# EAGLE board PowerBoard - Kopia (EAGLE 6.5.0), part 1 of 2
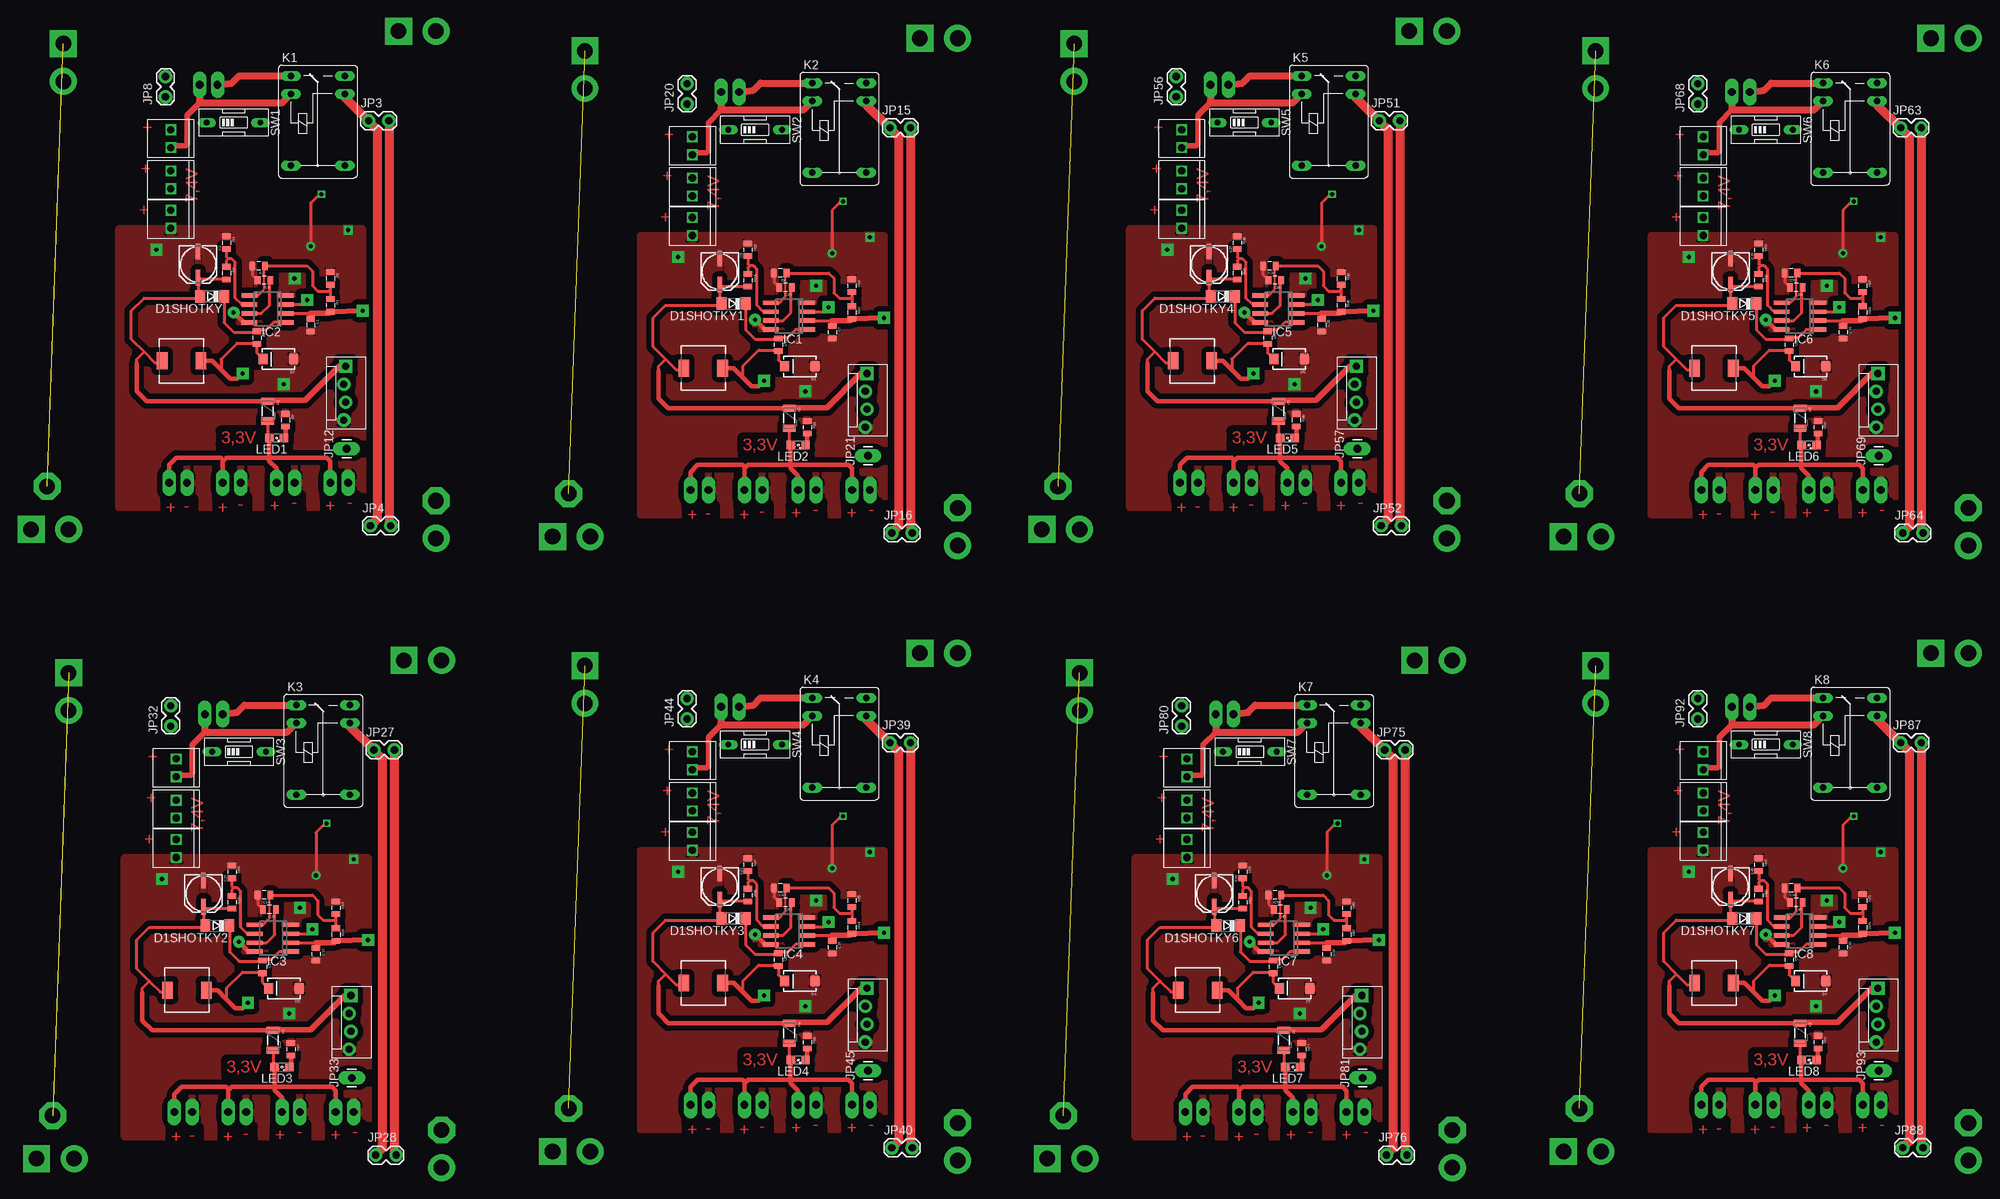
[diagram p0: board, top side]
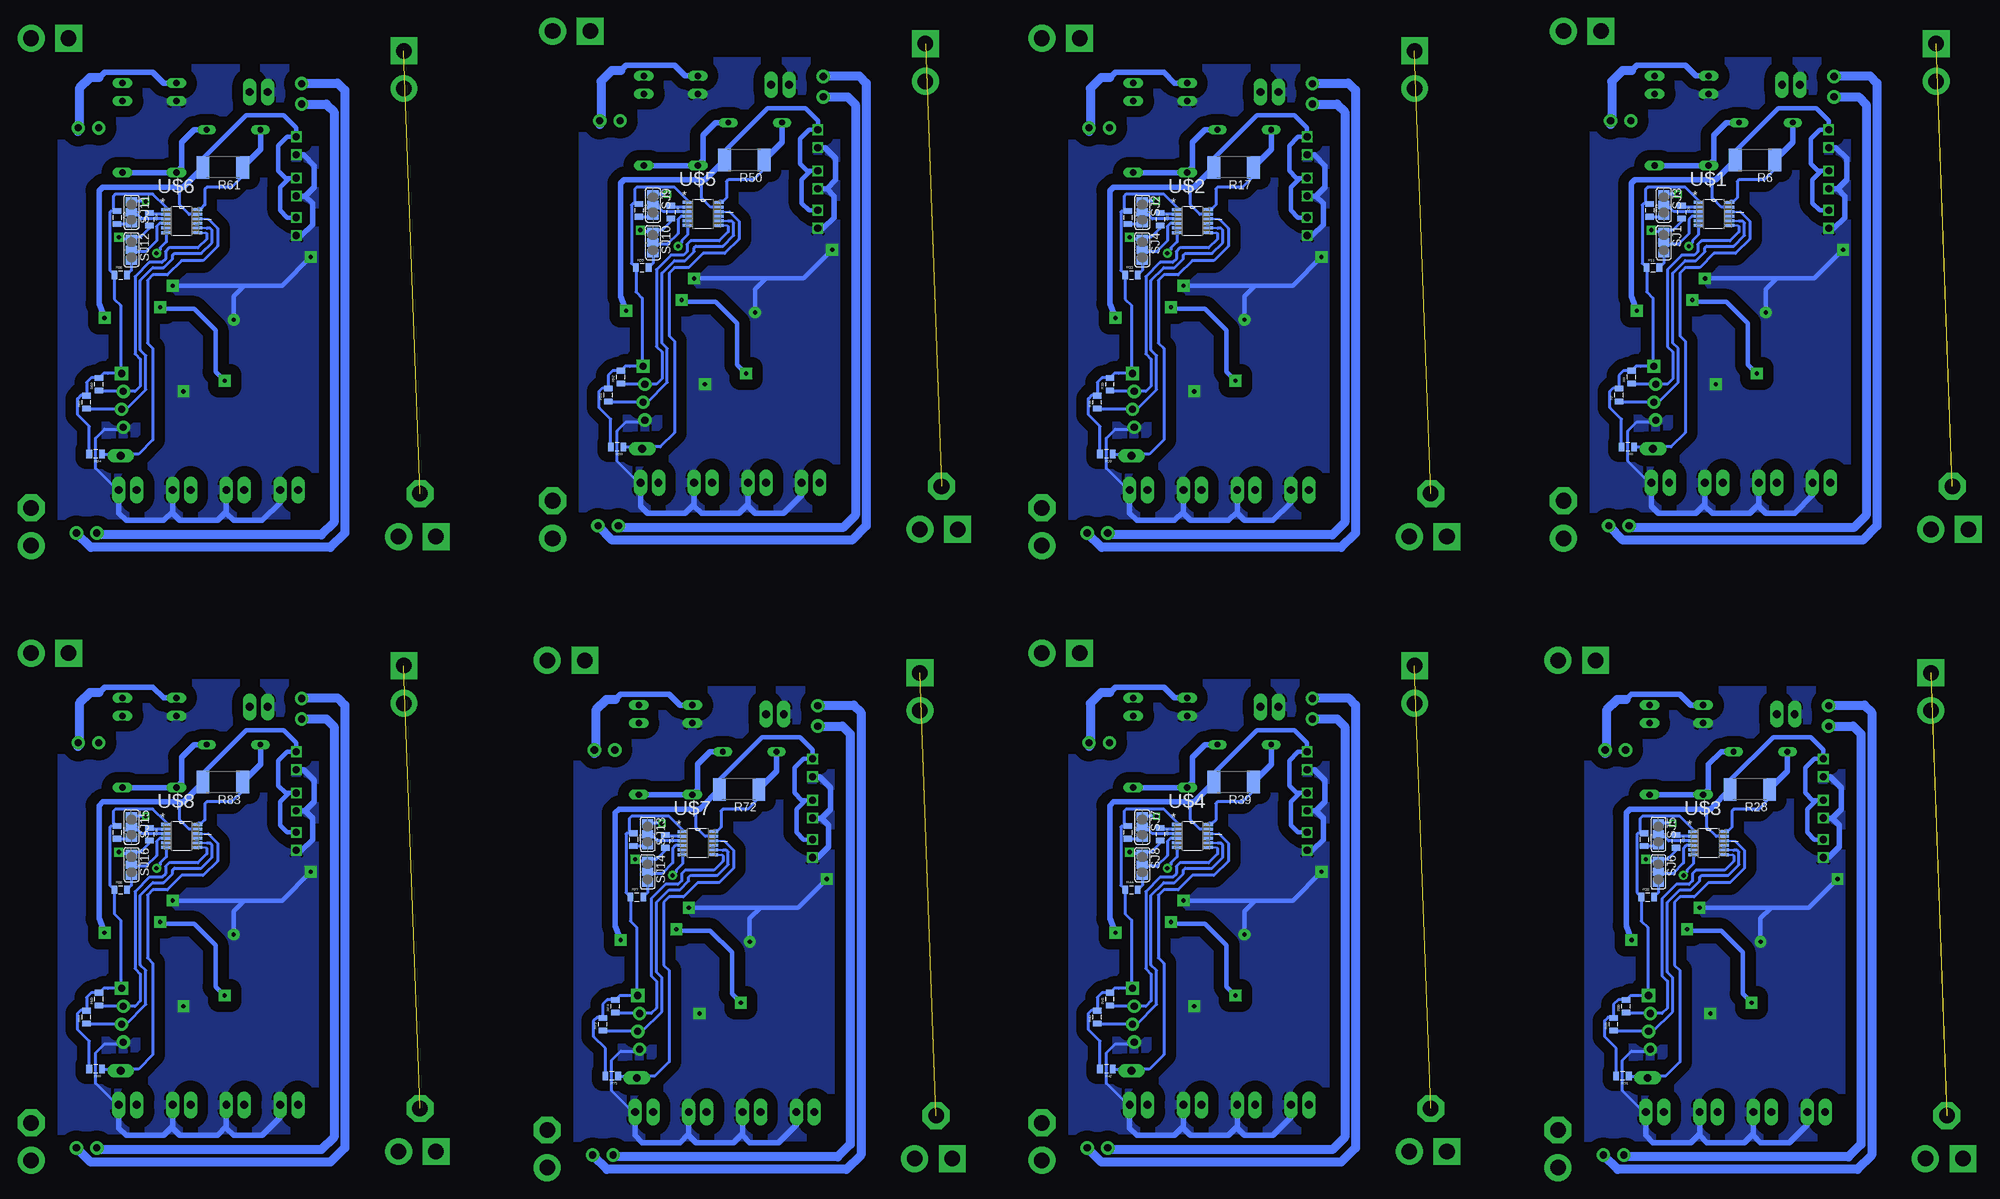
[diagram p1: board, bottom side, seen from below]

No outline drawn. Coordinates in mm, seen from the top.
Copper layers (1*16): Top 0.035mm / dielectric 1.5mm / Bottom 0.035mm
Design rules "default": minimum track width 10mil, minimum drill 24mil, track to track 8mil, track to pad 8mil, pad to pad 8mil, via to via 8mil, smd to smd 8mil, copper to edge 40mil, drill to drill 8mil, minimum pad ring 10mil, minimum via ring 8mil, stop-mask expansion 4mil, vias tented up to drill 0mil, thermal gap 10mil

## Footprints (pad centres in the part's own frame; a part is rotated, then mirrored left to right if it is on the bottom)
0805 = smd 0.8 x 1.2: 1 -0.9,0; 2 0.9,0
PANASONIC_C = smd 2.2 x 0.65: + 1.9,-0.2; - -1.8,-0.2
SMA-DIODE = smd 1.27 x 1.47: A -2.15,0; C 2.15,0
SOD80C = smd 1.4 x 1.8: A 1.7,0; C -1.7,0
PTC-1206 = smd 1 x 1.8: 1 -1.4,0; 2 1.4,0
SOIC8 = smd 0.6 x 2.2: 1 -1.905,-2.6; 2 -0.635,-2.6; 3 0.635,-2.6; 4 1.905,-2.6; 5 1.905,2.6; 6 0.635,2.6; 7 -0.635,2.6; 8 -1.905,2.6
1X02_LONGPADS = drill 1.118 pad 1.88 long: 1 0,0; 2 2.54,0
1X02_LOCK = drill 1.016 pad 1.88: 1 -0.178,0; 2 2.718,0
1X02_2.54_SCREWTERM = drill 1.016 square: P1 2.54,0; P2 0,0
1X01_LONGPAD = drill 1.118 pad 1.88 long: 1 0,0
FRS1B = drill 0.914 long: 1 0,3.81; 2 0,-3.81; O -2.54,-3.81; P 10.16,3.81; P@ 10.16,-3.81; S -2.54,3.81
B82462G = smd 2.4 x 1.5: P$1 0,2.75; P$2 0,-2.75
SML0805 = smd 1.2 x 1.2: A 1.05,0; C -1.05,0
MOLEX-1X4_LOCK = drill 1.016 pad 1.88 square: 1 0,0.127 | drill 1.016 pad 1.88: 2 2.54,-0.127; 3 5.08,0.127; 4 7.62,-0.127
R2512 = smd 1.8 x 3.2: 1 -2.8,0; 2 2.8,0
PAD-JUMPER-3-NO_YES_SILK_FULL_BOX = smd 1.168 x 1.6: 1 -1.524,0; 2 0,0; 3 1.524,0
EDG-01 = drill 0.813 long: 1 0,-3.81; 2 0,3.81
SOP65P490X110-12N = smd 1.397 x 0.432: 1 -2.184,1.626; 2 -2.184,0.965; 3 -2.184,0.33; 4 -2.184,-0.33; 5 -2.184,-0.965; 6 -2.184,-1.626; 7 2.184,-1.626; 8 2.184,-0.965; 9 2.184,-0.33; 10 2.184,0.33; 11 2.184,0.965; 12 2.184,1.626

## Placement (x,y rotation side)
C1  2.2uF  [0805]  51.05,61.21 270 top
C2  1nF  [0805]  43.69,69.6 180 top
C3  10uF  [PANASONIC_C]  35.31,69.85 270 top
C4  2.2nF  [0805]  44.45,67.56 180 top
C5  1nF  [0805]  43.43,59.44 270 top
C6  0.1uF  [0805]  52.07,77.22 270 bottom
C7  2.2uF  [0805]  124.97,60.2 270 top
C8  1nF  [0805]  117.6,68.58 180 top
C9  10uF  [PANASONIC_C]  109.22,68.83 270 top
C10  2.2nF  [0805]  118.36,66.55 180 top
C11  1nF  [0805]  117.35,58.42 270 top
C12  0.1uF  [0805]  125.98,76.2 270 bottom
C13  2.2uF  [0805]  51.82,-27.94 270 top
C14  1nF  [0805]  44.45,-19.56 180 top
C15  10uF  [PANASONIC_C]  36.07,-19.3 270 top
C16  2.2nF  [0805]  45.21,-21.59 180 top
C17  1nF  [0805]  44.2,-29.72 270 top
C18  0.1uF  [0805]  52.83,-11.94 270 bottom
C19  2.2uF  [0805]  124.97,-26.92 270 top
C20  1nF  [0805]  117.6,-18.54 180 top
C21  10uF  [PANASONIC_C]  109.22,-18.29 270 top
C22  2.2nF  [0805]  118.36,-20.57 180 top
C23  1nF  [0805]  117.35,-28.7 270 top
C24  0.1uF  [0805]  125.98,-10.92 270 bottom
C25  2.2uF  [0805]  194.31,61.21 270 top
C26  1nF  [0805]  186.94,69.6 180 top
C27  10uF  [PANASONIC_C]  178.56,69.85 270 top
C28  2.2nF  [0805]  187.71,67.56 180 top
C29  1nF  [0805]  186.69,59.44 270 top
C30  0.1uF  [0805]  195.33,77.22 270 bottom
C31  2.2uF  [0805]  268.22,60.2 270 top
C32  1nF  [0805]  260.86,68.58 180 top
C33  10uF  [PANASONIC_C]  252.48,68.83 270 top
C34  2.2nF  [0805]  261.62,66.55 180 top
C35  1nF  [0805]  260.6,58.42 270 top
C36  0.1uF  [0805]  269.24,76.2 270 bottom
C37  2.2uF  [0805]  195.07,-27.94 270 top
C38  1nF  [0805]  187.71,-19.56 180 top
C39  10uF  [PANASONIC_C]  179.32,-19.3 270 top
C40  2.2nF  [0805]  188.47,-21.59 180 top
C41  1nF  [0805]  187.45,-29.72 270 top
C42  0.1uF  [0805]  196.09,-11.94 270 bottom
C43  2.2uF  [0805]  268.22,-26.92 270 top
C44  1nF  [0805]  260.86,-18.54 180 top
C45  10uF  [PANASONIC_C]  252.48,-18.29 270 top
C46  2.2nF  [0805]  261.62,-20.57 180 top
C47  1nF  [0805]  260.6,-28.7 270 top
C48  0.1uF  [0805]  269.24,-10.92 270 bottom
D1  MBRA140  [SMA-DIODE]  120.4,55.37 180 top
D1SHOTKY  200mA30V  [SOD80C]  37.08,65.28 180 top
D1SHOTKY1  200mA30V  [SOD80C]  111,64.26 180 top
D1SHOTKY2  200mA30V  [SOD80C]  37.85,-23.88 180 top
D1SHOTKY3  200mA30V  [SOD80C]  111,-22.86 180 top
D1SHOTKY4  200mA30V  [SOD80C]  180.34,65.28 180 top
D1SHOTKY5  200mA30V  [SOD80C]  254.25,64.26 180 top
D1SHOTKY6  200mA30V  [SOD80C]  181.1,-23.88 180 top
D1SHOTKY7  200mA30V  [SOD80C]  254.25,-22.86 180 top
D2  MBRA140  [SMA-DIODE]  46.48,56.39 180 top
D3  MBRA140  [SMA-DIODE]  47.24,-32.77 180 top
D4  MBRA140  [SMA-DIODE]  120.4,-31.75 180 top
D5  MBRA140  [SMA-DIODE]  189.74,56.39 180 top
D6  MBRA140  [SMA-DIODE]  263.65,55.37 180 top
D7  MBRA140  [SMA-DIODE]  190.5,-32.77 180 top
D8  MBRA140  [SMA-DIODE]  263.65,-31.75 180 top
F1  PTCTHERMISTOR1206  [PTC-1206]  44.96,49.02 270 top
F2  PTCTHERMISTOR1206  [PTC-1206]  118.87,48.01 270 top
F3  PTCTHERMISTOR1206  [PTC-1206]  45.72,-40.13 270 top
F4  PTCTHERMISTOR1206  [PTC-1206]  118.87,-39.12 270 top
F5  PTCTHERMISTOR1206  [PTC-1206]  188.21,49.02 270 top
F6  PTCTHERMISTOR1206  [PTC-1206]  262.13,48.01 270 top
F7  PTCTHERMISTOR1206  [PTC-1206]  188.98,-40.13 270 top
F8  PTCTHERMISTOR1206  [PTC-1206]  262.13,-39.12 270 top
IC1  LT1763CS8-1.5  [SOIC8]  118.87,62.48 90 top
IC2  LT1763CS8-1.5  [SOIC8]  44.96,63.5 90 top
IC3  LT1763CS8-1.5  [SOIC8]  45.72,-25.65 90 top
IC4  LT1763CS8-1.5  [SOIC8]  118.87,-24.64 90 top
IC5  LT1763CS8-1.5  [SOIC8]  188.21,63.5 90 top
IC6  LT1763CS8-1.5  [SOIC8]  262.13,62.48 90 top
IC7  LT1763CS8-1.5  [SOIC8]  188.98,-25.65 90 top
IC8  LT1763CS8-1.5  [SOIC8]  262.13,-24.64 90 top
JP1  M02PTH3  [1X02_LONGPADS]  35.31,95.25 0 top
JP2  M02PTH3  [1X02_LONGPADS]  46.23,38.86 0 top
JP3  M02LOCK  [1X02_LOCK]  59.44,90.17 0 top
JP4  M02LOCK  [1X02_LOCK]  59.69,32.77 0 top
JP5  M02PTH3  [1X02_LONGPADS]  53.85,38.86 0 top
JP6  M02PTH3  [1X02_LONGPADS]  38.61,38.86 0 top
JP7  M02PTH3  [1X02_LONGPADS]  30.99,38.86 0 top
JP8  M02LOCK  [1X02_LOCK]  30.48,93.73 90 top
JP9  M022.54MM_SCREWTERM  [1X02_2.54_SCREWTERM]  31.24,83.06 270 top
JP10  M022.54MM_SCREWTERM  [1X02_2.54_SCREWTERM]  31.24,88.9 270 top
JP11  M022.54MM_SCREWTERM  [1X02_2.54_SCREWTERM]  31.24,77.47 270 top
JP12  INT  [1X01_LONGPAD]  56.13,43.69 90 top
JP13  M02PTH3  [1X02_LONGPADS]  109.22,94.23 0 top
JP14  M02PTH3  [1X02_LONGPADS]  120.14,37.85 0 top
JP15  M02LOCK  [1X02_LOCK]  133.35,89.15 0 top
JP16  M02LOCK  [1X02_LOCK]  133.6,31.75 0 top
JP17  M02PTH3  [1X02_LONGPADS]  127.76,37.85 0 top
JP18  M02PTH3  [1X02_LONGPADS]  112.52,37.85 0 top
JP19  M02PTH3  [1X02_LONGPADS]  104.9,37.85 0 top
JP20  M02LOCK  [1X02_LOCK]  104.39,92.71 90 top
JP21  INT  [1X01_LONGPAD]  130.05,42.67 90 top
JP22  M022.54MM_SCREWTERM  [1X02_2.54_SCREWTERM]  105.16,82.04 270 top
JP23  M022.54MM_SCREWTERM  [1X02_2.54_SCREWTERM]  105.16,87.88 270 top
JP24  M022.54MM_SCREWTERM  [1X02_2.54_SCREWTERM]  105.16,76.45 270 top
JP25  M02PTH3  [1X02_LONGPADS]  36.07,6.1 0 top
JP26  M02PTH3  [1X02_LONGPADS]  46.99,-50.29 0 top
JP27  M02LOCK  [1X02_LOCK]  60.2,1.02 0 top
JP28  M02LOCK  [1X02_LOCK]  60.45,-56.39 0 top
JP29  M02PTH3  [1X02_LONGPADS]  54.61,-50.29 0 top
JP30  M02PTH3  [1X02_LONGPADS]  39.37,-50.29 0 top
JP31  M02PTH3  [1X02_LONGPADS]  31.75,-50.29 0 top
JP32  M02LOCK  [1X02_LOCK]  31.24,4.57 90 top
JP33  INT  [1X01_LONGPAD]  56.9,-45.47 90 top
JP34  M022.54MM_SCREWTERM  [1X02_2.54_SCREWTERM]  32,-6.1 270 top
JP35  M022.54MM_SCREWTERM  [1X02_2.54_SCREWTERM]  32,-0.25 270 top
JP36  M022.54MM_SCREWTERM  [1X02_2.54_SCREWTERM]  32,-11.68 270 top
JP37  M02PTH3  [1X02_LONGPADS]  109.22,7.11 0 top
JP38  M02PTH3  [1X02_LONGPADS]  120.14,-49.28 0 top
JP39  M02LOCK  [1X02_LOCK]  133.35,2.03 0 top
JP40  M02LOCK  [1X02_LOCK]  133.6,-55.37 0 top
JP41  M02PTH3  [1X02_LONGPADS]  127.76,-49.28 0 top
JP42  M02PTH3  [1X02_LONGPADS]  112.52,-49.28 0 top
JP43  M02PTH3  [1X02_LONGPADS]  104.9,-49.28 0 top
JP44  M02LOCK  [1X02_LOCK]  104.39,5.59 90 top
JP45  INT  [1X01_LONGPAD]  130.05,-44.45 90 top
JP46  M022.54MM_SCREWTERM  [1X02_2.54_SCREWTERM]  105.16,-5.08 270 top
JP47  M022.54MM_SCREWTERM  [1X02_2.54_SCREWTERM]  105.16,0.76 270 top
JP48  M022.54MM_SCREWTERM  [1X02_2.54_SCREWTERM]  105.16,-10.67 270 top
JP49  M02PTH3  [1X02_LONGPADS]  178.56,95.25 0 top
JP50  M02PTH3  [1X02_LONGPADS]  189.48,38.86 0 top
JP51  M02LOCK  [1X02_LOCK]  202.69,90.17 0 top
JP52  M02LOCK  [1X02_LOCK]  202.95,32.77 0 top
JP53  M02PTH3  [1X02_LONGPADS]  197.1,38.86 0 top
JP54  M02PTH3  [1X02_LONGPADS]  181.86,38.86 0 top
JP55  M02PTH3  [1X02_LONGPADS]  174.24,38.86 0 top
JP56  M02LOCK  [1X02_LOCK]  173.74,93.73 90 top
JP57  INT  [1X01_LONGPAD]  199.39,43.69 90 top
JP58  M022.54MM_SCREWTERM  [1X02_2.54_SCREWTERM]  174.5,83.06 270 top
JP59  M022.54MM_SCREWTERM  [1X02_2.54_SCREWTERM]  174.5,88.9 270 top
JP60  M022.54MM_SCREWTERM  [1X02_2.54_SCREWTERM]  174.5,77.47 270 top
JP61  M02PTH3  [1X02_LONGPADS]  252.48,94.23 0 top
JP62  M02PTH3  [1X02_LONGPADS]  263.4,37.85 0 top
JP63  M02LOCK  [1X02_LOCK]  276.61,89.15 0 top
JP64  M02LOCK  [1X02_LOCK]  276.86,31.75 0 top
JP65  M02PTH3  [1X02_LONGPADS]  271.02,37.85 0 top
JP66  M02PTH3  [1X02_LONGPADS]  255.78,37.85 0 top
JP67  M02PTH3  [1X02_LONGPADS]  248.16,37.85 0 top
JP68  M02LOCK  [1X02_LOCK]  247.65,92.71 90 top
JP69  INT  [1X01_LONGPAD]  273.3,42.67 90 top
JP70  M022.54MM_SCREWTERM  [1X02_2.54_SCREWTERM]  248.41,82.04 270 top
JP71  M022.54MM_SCREWTERM  [1X02_2.54_SCREWTERM]  248.41,87.88 270 top
JP72  M022.54MM_SCREWTERM  [1X02_2.54_SCREWTERM]  248.41,76.45 270 top
JP73  M02PTH3  [1X02_LONGPADS]  179.32,6.1 0 top
JP74  M02PTH3  [1X02_LONGPADS]  190.25,-50.29 0 top
JP75  M02LOCK  [1X02_LOCK]  203.45,1.02 0 top
JP76  M02LOCK  [1X02_LOCK]  203.71,-56.39 0 top
JP77  M02PTH3  [1X02_LONGPADS]  197.87,-50.29 0 top
JP78  M02PTH3  [1X02_LONGPADS]  182.63,-50.29 0 top
JP79  M02PTH3  [1X02_LONGPADS]  175.01,-50.29 0 top
JP80  M02LOCK  [1X02_LOCK]  174.5,4.57 90 top
JP81  INT  [1X01_LONGPAD]  200.15,-45.47 90 top
JP82  M022.54MM_SCREWTERM  [1X02_2.54_SCREWTERM]  175.26,-6.1 270 top
JP83  M022.54MM_SCREWTERM  [1X02_2.54_SCREWTERM]  175.26,-0.25 270 top
JP84  M022.54MM_SCREWTERM  [1X02_2.54_SCREWTERM]  175.26,-11.68 270 top
JP85  M02PTH3  [1X02_LONGPADS]  252.48,7.11 0 top
JP86  M02PTH3  [1X02_LONGPADS]  263.4,-49.28 0 top
JP87  M02LOCK  [1X02_LOCK]  276.61,2.03 0 top
JP88  M02LOCK  [1X02_LOCK]  276.86,-55.37 0 top
JP89  M02PTH3  [1X02_LONGPADS]  271.02,-49.28 0 top
JP90  M02PTH3  [1X02_LONGPADS]  255.78,-49.28 0 top
JP91  M02PTH3  [1X02_LONGPADS]  248.16,-49.28 0 top
JP92  M02LOCK  [1X02_LOCK]  247.65,5.59 90 top
JP93  INT  [1X01_LONGPAD]  273.3,-44.45 90 top
JP94  M022.54MM_SCREWTERM  [1X02_2.54_SCREWTERM]  248.41,-5.08 270 top
JP95  M022.54MM_SCREWTERM  [1X02_2.54_SCREWTERM]  248.41,0.76 270 top
JP96  M022.54MM_SCREWTERM  [1X02_2.54_SCREWTERM]  248.41,-10.67 270 top
K1  FRS1B  [FRS1B]  52.07,93.98 270 top
K2  FRS1B  [FRS1B]  125.98,92.96 270 top
K3  FRS1B  [FRS1B]  52.83,4.83 270 top
K4  FRS1B  [FRS1B]  125.98,5.84 270 top
K5  FRS1B  [FRS1B]  195.33,93.98 270 top
K6  FRS1B  [FRS1B]  269.24,92.96 270 top
K7  FRS1B  [FRS1B]  196.09,4.83 270 top
K8  FRS1B  [FRS1B]  269.24,5.84 270 top
L1  1.5uH  [B82462G]  106.68,55.12 270 top
L2  1.5uH  [B82462G]  32.77,56.13 270 top
L3  1.5uH  [B82462G]  33.53,-33.02 270 top
L4  1.5uH  [B82462G]  106.68,-32 270 top
L5  1.5uH  [B82462G]  176.02,56.13 270 top
L6  1.5uH  [B82462G]  249.94,55.12 270 top
L7  1.5uH  [B82462G]  176.78,-33.02 270 top
L8  1.5uH  [B82462G]  249.94,-32 270 top
LED1  [SML0805]  46.23,45.21 180 top
LED2  [SML0805]  120.14,44.2 180 top
LED3  [SML0805]  46.99,-43.94 180 top
LED4  [SML0805]  120.14,-42.93 180 top
LED5  [SML0805]  189.48,45.21 180 top
LED6  [SML0805]  263.4,44.2 180 top
LED7  [SML0805]  190.25,-43.94 180 top
LED8  [SML0805]  263.4,-42.93 180 top
MCU  [MOLEX-1X4_LOCK]  55.88,55.37 270 top
MCU1  [MOLEX-1X4_LOCK]  129.79,54.36 270 top
MCU2  [MOLEX-1X4_LOCK]  56.64,-33.78 270 top
MCU3  [MOLEX-1X4_LOCK]  129.79,-32.77 270 top
MCU4  [MOLEX-1X4_LOCK]  199.14,55.37 270 top
MCU5  [MOLEX-1X4_LOCK]  273.05,54.36 270 top
MCU6  [MOLEX-1X4_LOCK]  199.9,-33.78 270 top
MCU7  [MOLEX-1X4_LOCK]  273.05,-32.77 270 top
R1  220k  [0805]  53.85,64.01 270 top
R2  47k  [0805]  53.85,67.82 270 top
R3  18k  [0805]  39.12,68.58 270 top
R4  10k  [0805]  39.12,72.9 270 top
R5  330R  [0805]  47.5,47.75 270 top
R6  0.02R  [R2512]  41.66,84.58 180 bottom
R7  4,7k  [0805]  60.96,51.31 90 bottom
R8  4,7k  [0805]  59.18,53.85 90 bottom
R9  10k  [0805]  59.69,43.94 180 bottom
R10  10k  [0805]  56.64,77.47 270 bottom
R11  10k  [0805]  56.13,69.34 0 bottom
R12  220k  [0805]  127.76,62.99 270 top
R13  47k  [0805]  127.76,66.8 270 top
R14  18k  [0805]  113.03,67.56 270 top
R15  10k  [0805]  113.03,71.88 270 top
R16  330R  [0805]  121.41,46.74 270 top
R17  0.02R  [R2512]  115.57,83.57 180 bottom
R18  4,7k  [0805]  134.87,50.29 90 bottom
R19  4,7k  [0805]  133.1,52.83 90 bottom
R20  10k  [0805]  133.6,42.93 180 bottom
R21  10k  [0805]  130.56,76.45 270 bottom
R22  10k  [0805]  130.05,68.33 0 bottom
R23  220k  [0805]  54.61,-25.15 270 top
R24  47k  [0805]  54.61,-21.34 270 top
R25  18k  [0805]  39.88,-20.57 270 top
R26  10k  [0805]  39.88,-16.26 270 top
R27  330R  [0805]  48.26,-41.4 270 top
R28  0.02R  [R2512]  42.42,-4.57 180 bottom
R29  4,7k  [0805]  61.72,-37.85 90 bottom
R30  4,7k  [0805]  59.94,-35.31 90 bottom
R31  10k  [0805]  60.45,-45.21 180 bottom
R32  10k  [0805]  57.4,-11.68 270 bottom
R33  10k  [0805]  56.9,-19.81 0 bottom
R34  220k  [0805]  127.76,-24.13 270 top
R35  47k  [0805]  127.76,-20.32 270 top
R36  18k  [0805]  113.03,-19.56 270 top
R37  10k  [0805]  113.03,-15.24 270 top
R38  330R  [0805]  121.41,-40.39 270 top
R39  0.02R  [R2512]  115.57,-3.56 180 bottom
R40  4,7k  [0805]  134.87,-36.83 90 bottom
R41  4,7k  [0805]  133.1,-34.29 90 bottom
R42  10k  [0805]  133.6,-44.2 180 bottom
R43  10k  [0805]  130.56,-10.67 270 bottom
R44  10k  [0805]  130.05,-18.8 0 bottom
R45  220k  [0805]  197.1,64.01 270 top
R46  47k  [0805]  197.1,67.82 270 top
R47  18k  [0805]  182.37,68.58 270 top
R48  10k  [0805]  182.37,72.9 270 top
R49  330R  [0805]  190.75,47.75 270 top
R50  0.02R  [R2512]  184.91,84.58 180 bottom
R51  4,7k  [0805]  204.22,51.31 90 bottom
R52  4,7k  [0805]  202.44,53.85 90 bottom
R53  10k  [0805]  202.95,43.94 180 bottom
R54  10k  [0805]  199.9,77.47 270 bottom
R55  10k  [0805]  199.39,69.34 0 bottom
R56  220k  [0805]  271.02,62.99 270 top
R57  47k  [0805]  271.02,66.8 270 top
R58  18k  [0805]  256.29,67.56 270 top
R59  10k  [0805]  256.29,71.88 270 top
R60  330R  [0805]  264.67,46.74 270 top
R61  0.02R  [R2512]  258.83,83.57 180 bottom
R62  4,7k  [0805]  278.13,50.29 90 bottom
R63  4,7k  [0805]  276.35,52.83 90 bottom
R64  10k  [0805]  276.86,42.93 180 bottom
R65  10k  [0805]  273.81,76.45 270 bottom
R66  10k  [0805]  273.3,68.33 0 bottom
R67  220k  [0805]  197.87,-25.15 270 top
R68  47k  [0805]  197.87,-21.34 270 top
R69  18k  [0805]  183.13,-20.57 270 top
R70  10k  [0805]  183.13,-16.26 270 top
R71  330R  [0805]  191.52,-41.4 270 top
R72  0.02R  [R2512]  185.67,-4.57 180 bottom
R73  4,7k  [0805]  204.98,-37.85 90 bottom
R74  4,7k  [0805]  203.2,-35.31 90 bottom
R75  10k  [0805]  203.71,-45.21 180 bottom
R76  10k  [0805]  200.66,-11.68 270 bottom
R77  10k  [0805]  200.15,-19.81 0 bottom
R78  220k  [0805]  271.02,-24.13 270 top
R79  47k  [0805]  271.02,-20.32 270 top
R80  18k  [0805]  256.29,-19.56 270 top
R81  10k  [0805]  256.29,-15.24 270 top
R82  330R  [0805]  264.67,-40.39 270 top
R83  0.02R  [R2512]  258.83,-3.56 180 bottom
R84  4,7k  [0805]  278.13,-36.83 90 bottom
R85  4,7k  [0805]  276.35,-34.29 90 bottom
R86  10k  [0805]  276.86,-44.2 180 bottom
R87  10k  [0805]  273.81,-10.67 270 bottom
R88  10k  [0805]  273.3,-18.8 0 bottom
SJ1  JUMPER-PAD-3-NOFULL_BOX_SILK  [PAD-JUMPER-3-NO_YES_SILK_FULL_BOX]  54.61,72.9 270 bottom
SJ2  JUMPER-PAD-3-NOFULL_BOX_SILK  [PAD-JUMPER-3-NO_YES_SILK_FULL_BOX]  128.52,77.22 270 bottom
SJ3  JUMPER-PAD-3-NOFULL_BOX_SILK  [PAD-JUMPER-3-NO_YES_SILK_FULL_BOX]  54.61,78.23 270 bottom
SJ4  JUMPER-PAD-3-NOFULL_BOX_SILK  [PAD-JUMPER-3-NO_YES_SILK_FULL_BOX]  128.52,71.88 270 bottom
SJ5  JUMPER-PAD-3-NOFULL_BOX_SILK  [PAD-JUMPER-3-NO_YES_SILK_FULL_BOX]  55.37,-10.92 270 bottom
SJ6  JUMPER-PAD-3-NOFULL_BOX_SILK  [PAD-JUMPER-3-NO_YES_SILK_FULL_BOX]  55.37,-16.26 270 bottom
SJ7  JUMPER-PAD-3-NOFULL_BOX_SILK  [PAD-JUMPER-3-NO_YES_SILK_FULL_BOX]  128.52,-9.91 270 bottom
SJ8  JUMPER-PAD-3-NOFULL_BOX_SILK  [PAD-JUMPER-3-NO_YES_SILK_FULL_BOX]  128.52,-15.24 270 bottom
SJ9  JUMPER-PAD-3-NOFULL_BOX_SILK  [PAD-JUMPER-3-NO_YES_SILK_FULL_BOX]  197.87,78.23 270 bottom
SJ10  JUMPER-PAD-3-NOFULL_BOX_SILK  [PAD-JUMPER-3-NO_YES_SILK_FULL_BOX]  197.87,72.9 270 bottom
SJ11  JUMPER-PAD-3-NOFULL_BOX_SILK  [PAD-JUMPER-3-NO_YES_SILK_FULL_BOX]  271.78,77.22 270 bottom
SJ12  JUMPER-PAD-3-NOFULL_BOX_SILK  [PAD-JUMPER-3-NO_YES_SILK_FULL_BOX]  271.78,71.88 270 bottom
SJ13  JUMPER-PAD-3-NOFULL_BOX_SILK  [PAD-JUMPER-3-NO_YES_SILK_FULL_BOX]  198.63,-10.92 270 bottom
SJ14  JUMPER-PAD-3-NOFULL_BOX_SILK  [PAD-JUMPER-3-NO_YES_SILK_FULL_BOX]  198.63,-16.26 270 bottom
SJ15  JUMPER-PAD-3-NOFULL_BOX_SILK  [PAD-JUMPER-3-NO_YES_SILK_FULL_BOX]  271.78,-9.91 270 bottom
SJ16  JUMPER-PAD-3-NOFULL_BOX_SILK  [PAD-JUMPER-3-NO_YES_SILK_FULL_BOX]  271.78,-15.24 270 bottom
SW1  [EDG-01]  40.13,89.92 270 top
SW2  [EDG-01]  114.05,88.9 270 top
SW3  [EDG-01]  40.89,0.76 270 top
SW4  [EDG-01]  114.05,1.78 270 top
SW5  [EDG-01]  183.39,89.92 270 top
SW6  [EDG-01]  257.3,88.9 270 top
SW7  [EDG-01]  184.15,0.76 270 top
SW8  [EDG-01]  257.3,1.78 270 top
U$1  LTC2945  [SOP65P490X110-12N]  47.5,76.96 0 bottom
U$2  LTC2945  [SOP65P490X110-12N]  121.41,75.95 0 bottom
U$3  LTC2945  [SOP65P490X110-12N]  48.26,-12.19 0 bottom
U$4  LTC2945  [SOP65P490X110-12N]  121.41,-11.18 0 bottom
U$5  LTC2945  [SOP65P490X110-12N]  190.75,76.96 0 bottom
U$6  LTC2945  [SOP65P490X110-12N]  264.67,75.95 0 bottom
U$7  LTC2945  [SOP65P490X110-12N]  191.52,-12.19 0 bottom
U$8  LTC2945  [SOP65P490X110-12N]  264.67,-11.18 0 bottom

## Library data of the parts
C1 C2 C4-C8 C10-C14 C16-C20 C22-C26 C28-C32 C34-C38 C40-C44 C46-C48 = SparkFun-Capacitors
C3 C9 C15 C21 C27 C33 C39 C45 L1-L8 R6 R17 R28 R39 R50 R61 R72 R83 SJ1-SJ16 = SparkFun-Passives
D1-D8 = SparkFun-DiscreteSemi; PROD_ID: DIO-08053
D1SHOTKY D1SHOTKY1-D1SHOTKY7 = diode
F1-F8 = SparkFun-PowerIC; PROD_ID: RES-08585
IC1-IC8 = linear-technology; MPN: LT1763CS8-1.5; OC_FARNELL: 1501016; OC_NEWARK: 57M6043
JP1-JP96 MCU MCU1-MCU7 = SparkFun-Connectors
K1-K8 = relay; OC_FARNELL: unknown; OC_NEWARK: unknown
LED1-LED8 = led
R1-R5 R7-R16 R18-R27 R29-R38 R40-R49 R51-R60 R62-R71 R73-R82 R84-R88 = SparkFun-Resistors
SW1-SW8 = special
U$1-U$8 = LTC_By_element14_Batch_1

## Nets
3,3V: C3.+ D1SHOTKY.A F1.1 L2.P$2 MCU.1 R3.2 R7.2 R8.2 R9.2 R10.1 R11.1 U$1.1
3,3V1: C9.+ D1SHOTKY1.A F2.1 L1.P$2 MCU1.1 R14.2 R18.2 R19.2 R20.2 R21.1 R22.1 U$2.1
3,3V2: C15.+ D1SHOTKY2.A F3.1 L3.P$2 MCU2.1 R25.2 R29.2 R30.2 R31.2 R32.1 R33.1 U$3.1
3,3V3: C21.+ D1SHOTKY3.A F4.1 L4.P$2 MCU3.1 R36.2 R40.2 R41.2 R42.2 R43.1 R44.1 U$4.1
3,3V4: C27.+ D1SHOTKY4.A F5.1 L5.P$2 MCU4.1 R47.2 R51.2 R52.2 R53.2 R54.1 R55.1 U$5.1
3,3V5: C33.+ D1SHOTKY5.A F6.1 L6.P$2 MCU5.1 R58.2 R62.2 R63.2 R64.2 R65.1 R66.1 U$6.1
3,3V6: C39.+ D1SHOTKY6.A F7.1 L7.P$2 MCU6.1 R69.2 R73.2 R74.2 R75.2 R76.1 R77.1 U$7.1
3,3V7: C45.+ D1SHOTKY7.A F8.1 L8.P$2 MCU7.1 R80.2 R84.2 R85.2 R86.2 R87.1 R88.1 U$8.1
7,4V: C1.1 IC2.2 JP9.P2 JP10.P2 JP11.P2 R1.2 R6.2 U$1.11
7,4V1: C7.1 IC1.2 JP22.P2 JP23.P2 JP24.P2 R12.2 R17.2 U$2.11
7,4V2: C13.1 IC3.2 JP34.P2 JP35.P2 JP36.P2 R23.2 R28.2 U$3.11
7,4V3: C19.1 IC4.2 JP46.P2 JP47.P2 JP48.P2 R34.2 R39.2 U$4.11
7,4V4: C25.1 IC5.2 JP58.P2 JP59.P2 JP60.P2 R45.2 R50.2 U$5.11
7,4V5: C31.1 IC6.2 JP70.P2 JP71.P2 JP72.P2 R56.2 R61.2 U$6.11
7,4V6: C37.1 IC7.2 JP82.P2 JP83.P2 JP84.P2 R67.2 R72.2 U$7.11
7,4V7: C43.1 IC8.2 JP94.P2 JP95.P2 JP96.P2 R78.2 R83.2 U$8.11
AFERFUSE: F1.2 JP2.1 JP5.1 JP6.1 JP7.1 LED1.A
AFERFUSE1: F2.2 JP14.1 JP17.1 JP18.1 JP19.1 LED2.A
AFERFUSE2: F3.2 JP26.1 JP29.1 JP30.1 JP31.1 LED3.A
AFERFUSE3: F4.2 JP38.1 JP41.1 JP42.1 JP43.1 LED4.A
AFERFUSE4: F5.2 JP50.1 JP53.1 JP54.1 JP55.1 LED5.A
AFERFUSE5: F6.2 JP62.1 JP65.1 JP66.1 JP67.1 LED6.A
AFERFUSE6: F7.2 JP74.1 JP77.1 JP78.1 JP79.1 LED7.A
AFERFUSE7: F8.2 JP86.1 JP89.1 JP90.1 JP91.1 LED8.A
COIL: JP3.1 JP4.1 JP8.1 K1.1
COIL1: JP15.1 JP16.1 JP20.1 K2.1
COIL2: JP27.1 JP28.1 JP32.1 K3.1
COIL3: JP39.1 JP40.1 JP44.1 K4.1
COIL4: JP51.1 JP52.1 JP56.1 K5.1
COIL5: JP63.1 JP64.1 JP68.1 K6.1
COIL6: JP75.1 JP76.1 JP80.1 K7.1
COIL7: JP87.1 JP88.1 JP92.1 K8.1
COUT: C5.2 D2.C IC2.3 L2.P$1
COUT1: C11.2 D1.C IC1.3 L1.P$1
COUT2: C17.2 D3.C IC3.3 L3.P$1
COUT3: C23.2 D4.C IC4.3 L4.P$1
COUT4: C29.2 D5.C IC5.3 L5.P$1
COUT5: C35.2 D6.C IC6.3 L6.P$1
COUT6: C41.2 D7.C IC7.3 L7.P$1
COUT7: C47.2 D8.C IC8.3 L8.P$1
GND: C1.2 C2.2 C3.- C4.2 C6.2 D2.A IC2.4 IC2.8 JP1.1 JP2.2 JP5.2 JP6.2 JP7.2 JP9.P1 JP10.P1 JP11.P1 K1.2 MCU.4 R2.1 R4.1 R5.1 SJ1.1 SJ3.1 U$1.5 U$1.6
GND1: C7.2 C8.2 C9.- C10.2 C12.2 D1.A IC1.4 IC1.8 JP13.1 JP14.2 JP17.2 JP18.2 JP19.2 JP22.P1 JP23.P1 JP24.P1 K2.2 MCU1.4 R13.1 R15.1 R16.1 SJ2.1 SJ4.1 U$2.5 U$2.6
GND2: C13.2 C14.2 C15.- C16.2 C18.2 D3.A IC3.4 IC3.8 JP25.1 JP26.2 JP29.2 JP30.2 JP31.2 JP34.P1 JP35.P1 JP36.P1 K3.2 MCU2.4 R24.1 R26.1 R27.1 SJ5.1 SJ6.1 U$3.5 U$3.6
GND3: C19.2 C20.2 C21.- C22.2 C24.2 D4.A IC4.4 IC4.8 JP37.1 JP38.2 JP41.2 JP42.2 JP43.2 JP46.P1 JP47.P1 JP48.P1 K4.2 MCU3.4 R35.1 R37.1 R38.1 SJ7.1 SJ8.1 U$4.5 U$4.6
GND4: C25.2 C26.2 C27.- C28.2 C30.2 D5.A IC5.4 IC5.8 JP49.1 JP50.2 JP53.2 JP54.2 JP55.2 JP58.P1 JP59.P1 JP60.P1 K5.2 MCU4.4 R46.1 R48.1 R49.1 SJ9.1 SJ10.1 U$5.5 U$5.6
GND5: C31.2 C32.2 C33.- C34.2 C36.2 D6.A IC6.4 IC6.8 JP61.1 JP62.2 JP65.2 JP66.2 JP67.2 JP70.P1 JP71.P1 JP72.P1 K6.2 MCU5.4 R57.1 R59.1 R60.1 SJ11.1 SJ12.1 U$6.5 U$6.6
GND6: C37.2 C38.2 C39.- C40.2 C42.2 D7.A IC7.4 IC7.8 JP73.1 JP74.2 JP77.2 JP78.2 JP79.2 JP82.P1 JP83.P1 JP84.P1 K7.2 MCU6.4 R68.1 R70.1 R71.1 SJ13.1 SJ14.1 U$7.5 U$7.6
GND7: C43.2 C44.2 C45.- C46.2 C48.2 D8.A IC8.4 IC8.8 JP85.1 JP86.2 JP89.2 JP90.2 JP91.2 JP94.P1 JP95.P1 JP96.P1 K8.2 MCU7.4 R79.1 R81.1 R82.1 SJ15.1 SJ16.1 U$8.5 U$8.6
N$1: C2.1 IC2.5 R1.1 R2.2
N$2: C8.1 IC1.5 R12.1 R13.2
N$3: IC2.6 R3.1 R4.2
N$4: C4.1 IC2.7
N$5: C5.1 D1SHOTKY.C IC2.1
N$7: LED1.C R5.2
N$9: JP12.1 R9.1 U$1.10
N$10: MCU.2 R8.1 U$1.7
N$11: MCU.3 R7.1 U$1.8 U$1.9
N$12: C6.1 U$1.2
N$13: SJ3.2 U$1.3
N$14: SJ1.2 U$1.4
N$15: R10.2 SJ3.3
N$16: R11.2 SJ1.3
N$17: IC1.6 R14.1 R15.2
N$18: C10.1 IC1.7
N$19: C11.1 D1SHOTKY1.C IC1.1
N$20: LED2.C R16.2
N$22: C12.1 U$2.2
N$23: MCU1.2 R19.1 U$2.7
N$24: MCU1.3 R18.1 U$2.8 U$2.9
N$25: JP21.1 R20.1 U$2.10
N$26: SJ2.2 U$2.3
N$27: SJ4.2 U$2.4
N$28: R21.2 SJ2.3
N$29: R22.2 SJ4.3
N$30: C14.1 IC3.5 R23.1 R24.2
N$31: IC3.6 R25.1 R26.2
N$32: C16.1 IC3.7
N$33: C17.1 D1SHOTKY2.C IC3.1
N$34: LED3.C R27.2
N$36: C18.1 U$3.2
N$37: MCU2.2 R30.1 U$3.7
N$38: MCU2.3 R29.1 U$3.8 U$3.9
N$39: JP33.1 R31.1 U$3.10
N$40: SJ5.2 U$3.3
N$41: SJ6.2 U$3.4
N$42: R32.2 SJ5.3
N$43: R33.2 SJ6.3
N$44: C20.1 IC4.5 R34.1 R35.2
N$45: IC4.6 R36.1 R37.2
N$46: C22.1 IC4.7
N$47: C23.1 D1SHOTKY3.C IC4.1
N$48: LED4.C R38.2
N$50: C24.1 U$4.2
N$51: MCU3.2 R41.1 U$4.7
N$52: MCU3.3 R40.1 U$4.8 U$4.9
N$53: JP45.1 R42.1 U$4.10
N$54: SJ7.2 U$4.3
N$55: SJ8.2 U$4.4
N$56: R43.2 SJ7.3
N$57: R44.2 SJ8.3
N$58: C26.1 IC5.5 R45.1 R46.2
N$59: IC5.6 R47.1 R48.2
N$60: C28.1 IC5.7
N$61: C29.1 D1SHOTKY4.C IC5.1
N$62: LED5.C R49.2
N$64: C30.1 U$5.2
N$65: MCU4.2 R52.1 U$5.7
N$66: MCU4.3 R51.1 U$5.8 U$5.9
N$67: JP57.1 R53.1 U$5.10
N$68: SJ9.2 U$5.3
N$69: SJ10.2 U$5.4
N$70: R54.2 SJ9.3
N$71: R55.2 SJ10.3
N$72: C32.1 IC6.5 R56.1 R57.2
N$73: IC6.6 R58.1 R59.2
N$74: C34.1 IC6.7
N$75: C35.1 D1SHOTKY5.C IC6.1
N$76: LED6.C R60.2
N$78: C36.1 U$6.2
N$79: MCU5.2 R63.1 U$6.7
N$80: MCU5.3 R62.1 U$6.8 U$6.9
N$81: JP69.1 R64.1 U$6.10
N$82: SJ11.2 U$6.3
N$83: SJ12.2 U$6.4
N$84: R65.2 SJ11.3
N$85: R66.2 SJ12.3
N$86: C38.1 IC7.5 R67.1 R68.2
N$87: IC7.6 R69.1 R70.2
N$88: C40.1 IC7.7
N$89: C41.1 D1SHOTKY6.C IC7.1
N$90: LED7.C R71.2
N$92: C42.1 U$7.2
N$93: MCU6.2 R74.1 U$7.7
N$94: MCU6.3 R73.1 U$7.8 U$7.9
N$95: JP81.1 R75.1 U$7.10
N$96: SJ13.2 U$7.3
N$97: SJ14.2 U$7.4
N$98: R76.2 SJ13.3
N$99: R77.2 SJ14.3
N$100: C44.1 IC8.5 R78.1 R79.2
N$101: IC8.6 R80.1 R81.2
N$102: C46.1 IC8.7
N$103: C47.1 D1SHOTKY7.C IC8.1
N$104: LED8.C R82.2
N$106: C48.1 U$8.2
N$107: MCU7.2 R85.1 U$8.7
N$108: MCU7.3 R84.1 U$8.8 U$8.9
N$109: JP93.1 R86.1 U$8.10
N$110: SJ15.2 U$8.3
N$111: SJ16.2 U$8.4
N$112: R87.2 SJ15.3
N$113: R88.2 SJ16.3
POMIAR: R6.1 SW1.1 U$1.12
POMIAR1: R17.1 SW2.1 U$2.12
POMIAR2: R28.1 SW3.1 U$3.12
POMIAR3: R39.1 SW4.1 U$4.12
POMIAR4: R50.1 SW5.1 U$5.12
POMIAR5: R61.1 SW6.1 U$6.12
POMIAR6: R72.1 SW7.1 U$7.12
POMIAR7: R83.1 SW8.1 U$8.12
PRERELAY: JP1.2 JP3.2 JP4.2 JP8.2 K1.O
PRERELAY1: JP13.2 JP15.2 JP16.2 JP20.2 K2.O
PRERELAY2: JP25.2 JP27.2 JP28.2 JP32.2 K3.O
PRERELAY3: JP37.2 JP39.2 JP40.2 JP44.2 K4.O
PRERELAY4: JP49.2 JP51.2 JP52.2 JP56.2 K5.O
PRERELAY5: JP61.2 JP63.2 JP64.2 JP68.2 K6.O
PRERELAY6: JP73.2 JP75.2 JP76.2 JP80.2 K7.O
PRERELAY7: JP85.2 JP87.2 JP88.2 JP92.2 K8.O
PRESWITCH: K1.P K1.P@ SW1.2
PRESWITCH1: K2.P K2.P@ SW2.2
PRESWITCH2: K3.P K3.P@ SW3.2
PRESWITCH3: K4.P K4.P@ SW4.2
PRESWITCH4: K5.P K5.P@ SW5.2
PRESWITCH5: K6.P K6.P@ SW6.2
PRESWITCH6: K7.P K7.P@ SW7.2
PRESWITCH7: K8.P K8.P@ SW8.2

## Tracks (layer width: path | path; a pad name or v marks a point on that pad's centre or on a via)
3,3V
  Top 0.406: R3.2 35.38,67.68 C3.+ 35.11,65.56 D1SHOTKY.A 35.13,65.02 27.43,65.02 25.65,63.25 25.65,59.18 27.43,57.4 | 27.43,57.4 28.96,55.88 30.27,55.88 | 30.48,55.88 30.27,55.88 | 30.27,55.88 L2.P$2 | 26.42,55.77 26.42,56.39 27.43,57.4
  Top 0.61: F1.1 44.45,50.42 27.81,50.42 26.42,51.82 26.42,55.77
  Top 0.813: MCU.1 55.12,55.37 50.29,50.55 44.57,50.55 44.45,50.42
  Bottom 0.406: MCU.1 58.56,55.37 R8.2 60.31,54.75 60.96,54.1 R7.2 61.08,52.32 61.72,52.32 62.23,51.82 62.23,49.53 60.59,47.89 R9.2 | MCU.1 57.91,55.37 | U$1.1 49.68,78.89 51.56,80.77 56.9,80.77 57.15,80.52 57.15,78.74 56.78,78.37 R10.1 57.52,78.37 57.66,78.23 57.66,69.97 R11.1 57.03,65.92 56.13,65.02 56.13,55.5 MCU.1
3,3V1
  Top 0.406: R14.2 109.29,66.66 C9.+ 109.02,64.54 D1SHOTKY1.A 109.04,64.01 101.35,64.01 99.57,62.23 99.57,58.17 101.35,56.39 | 101.35,56.39 102.87,54.86 104.18,54.86 | 104.39,54.86 104.18,54.86 | 104.18,54.86 L1.P$2 | 100.33,54.76 100.33,55.37 101.35,56.39
  Top 0.61: F2.1 118.36,49.41 101.72,49.41 100.33,50.8 100.33,54.76
  Top 0.813: MCU1.1 129.03,54.36 124.21,49.53 118.49,49.53 118.36,49.41
  Bottom 0.406: MCU1.1 132.47,54.36 R19.2 134.23,53.73 134.87,53.09 R18.2 134.99,51.31 135.64,51.31 136.14,50.8 136.14,48.51 134.5,46.87 R20.2 | MCU1.1 131.83,54.36 | U$2.1 123.6,77.88 125.48,79.76 130.81,79.76 131.06,79.5 131.06,77.72 130.69,77.35 R21.1 131.43,77.35 131.57,77.22 131.57,68.95 R22.1 130.95,64.91 130.05,64.01 130.05,54.48 MCU1.1
3,3V2
  Top 0.406: R25.2 36.14,-21.47 C15.+ 35.87,-23.6 D1SHOTKY2.A 35.89,-24.13 28.19,-24.13 26.42,-25.91 26.42,-29.97 28.19,-31.75 | 28.19,-31.75 29.72,-33.27 31.03,-33.27 | 31.24,-33.27 31.03,-33.27 | 31.03,-33.27 L3.P$2 | 27.18,-33.38 27.18,-32.77 28.19,-31.75
  Top 0.61: F3.1 45.21,-38.73 28.57,-38.73 27.18,-37.34 27.18,-33.38
  Top 0.813: MCU2.1 55.88,-33.78 51.05,-38.61 45.34,-38.61 45.21,-38.73
  Bottom 0.406: MCU2.1 59.32,-33.78 R30.2 61.08,-34.41 61.72,-35.05 R29.2 61.84,-36.83 62.48,-36.83 62.99,-37.34 62.99,-39.62 61.35,-41.26 R31.2 | MCU2.1 58.67,-33.78 | U$3.1 50.44,-10.26 52.32,-8.38 57.66,-8.38 57.91,-8.64 57.91,-10.41 57.54,-10.78 R32.1 58.28,-10.78 58.42,-10.92 58.42,-19.19 R33.1 57.8,-23.23 56.9,-24.13 56.9,-33.66 MCU2.1
3,3V3
  Top 0.406: R36.2 109.29,-20.46 C21.+ 109.02,-22.58 D1SHOTKY3.A 109.04,-23.11 101.35,-23.11 99.57,-24.89 99.57,-28.96 101.35,-30.73 | 101.35,-30.73 102.87,-32.26 104.18,-32.26 | 104.39,-32.26 104.18,-32.26 | 104.18,-32.26 L4.P$2 | 100.33,-32.36 100.33,-31.75 101.35,-30.73
  Top 0.61: F4.1 118.36,-37.72 101.72,-37.72 100.33,-36.32 100.33,-32.36
  Top 0.813: MCU3.1 129.03,-32.77 124.21,-37.59 118.49,-37.59 118.36,-37.72
  Bottom 0.406: MCU3.1 132.47,-32.77 R41.2 134.23,-33.39 134.87,-34.04 R40.2 134.99,-35.81 135.64,-35.81 136.14,-36.32 136.14,-38.61 134.5,-40.25 R42.2 | MCU3.1 131.83,-32.77 | U$4.1 123.6,-9.25 125.48,-7.37 130.81,-7.37 131.06,-7.62 131.06,-9.4 130.69,-9.77 R43.1 131.43,-9.77 131.57,-9.91 131.57,-18.17 R44.1 130.95,-22.21 130.05,-23.11 130.05,-32.64 MCU3.1
3,3V4
  Top 0.406: R47.2 178.63,67.68 C27.+ 178.36,65.56 D1SHOTKY4.A 178.39,65.02 170.69,65.02 168.91,63.25 168.91,59.18 170.69,57.4 | 170.69,57.4 172.21,55.88 173.53,55.88 | 173.74,55.88 173.53,55.88 | 173.53,55.88 L5.P$2 | 169.67,55.77 169.67,56.39 170.69,57.4
  Top 0.61: F5.1 187.71,50.42 171.07,50.42 169.67,51.82 169.67,55.77
  Top 0.813: MCU4.1 198.37,55.37 193.55,50.55 187.83,50.55 187.71,50.42
  Bottom 0.406: MCU4.1 201.81,55.37 R52.2 203.57,54.75 204.22,54.1 R51.2 204.33,52.32 204.98,52.32 205.49,51.82 205.49,49.53 203.85,47.89 R53.2 | MCU4.1 201.17,55.37 | U$5.1 192.94,78.89 194.82,80.77 200.15,80.77 200.41,80.52 200.41,78.74 200.04,78.37 R54.1 200.78,78.37 200.91,78.23 200.91,69.97 R55.1 200.29,65.92 199.39,65.02 199.39,55.5 MCU4.1
3,3V5
  Top 0.406: R58.2 252.55,66.66 C33.+ 252.28,64.54 D1SHOTKY5.A 252.3,64.01 244.6,64.01 242.82,62.23 242.82,58.17 244.6,56.39 | 244.6,56.39 246.13,54.86 247.44,54.86 | 247.65,54.86 247.44,54.86 | 247.44,54.86 L6.P$2 | 243.59,54.76 243.59,55.37 244.6,56.39
  Top 0.61: F6.1 261.62,49.41 244.98,49.41 243.59,50.8 243.59,54.76
  Top 0.813: MCU5.1 272.29,54.36 267.46,49.53 261.74,49.53 261.62,49.41
  Bottom 0.406: MCU5.1 275.73,54.36 R63.2 277.48,53.73 278.13,53.09 R62.2 278.25,51.31 278.89,51.31 279.4,50.8 279.4,48.51 277.76,46.87 R64.2 | MCU5.1 275.08,54.36 | U$6.1 266.85,77.88 268.73,79.76 274.07,79.76 274.32,79.5 274.32,77.72 273.95,77.35 R65.1 274.69,77.35 274.83,77.22 274.83,68.95 R66.1 274.2,64.91 273.3,64.01 273.3,54.48 MCU5.1
3,3V6
  Top 0.406: R69.2 179.39,-21.47 C39.+ 179.12,-23.6 D1SHOTKY6.A 179.15,-24.13 171.45,-24.13 169.67,-25.91 169.67,-29.97 171.45,-31.75 | 171.45,-31.75 172.97,-33.27 174.29,-33.27 | 174.5,-33.27 174.29,-33.27 | 174.29,-33.27 L7.P$2 | 170.43,-33.38 170.43,-32.77 171.45,-31.75
  Top 0.61: F7.1 188.47,-38.73 171.83,-38.73 170.43,-37.34 170.43,-33.38
  Top 0.813: MCU6.1 199.14,-33.78 194.31,-38.61 188.59,-38.61 188.47,-38.73
  Bottom 0.406: MCU6.1 202.58,-33.78 R74.2 204.33,-34.41 204.98,-35.05 R73.2 205.09,-36.83 205.74,-36.83 206.25,-37.34 206.25,-39.62 204.61,-41.26 R75.2 | MCU6.1 201.93,-33.78 | U$7.1 193.7,-10.26 195.58,-8.38 200.91,-8.38 201.17,-8.64 201.17,-10.41 200.8,-10.78 R76.1 201.54,-10.78 201.68,-10.92 201.68,-19.19 R77.1 201.05,-23.23 200.15,-24.13 200.15,-33.66 MCU6.1
3,3V7
  Top 0.406: R80.2 252.55,-20.46 C45.+ 252.28,-22.58 D1SHOTKY7.A 252.3,-23.11 244.6,-23.11 242.82,-24.89 242.82,-28.96 244.6,-30.73 | 244.6,-30.73 246.13,-32.26 247.44,-32.26 | 247.65,-32.26 247.44,-32.26 | 247.44,-32.26 L8.P$2 | 243.59,-32.36 243.59,-31.75 244.6,-30.73
  Top 0.61: F8.1 261.62,-37.72 244.98,-37.72 243.59,-36.32 243.59,-32.36
  Top 0.813: MCU7.1 272.29,-32.77 267.46,-37.59 261.74,-37.59 261.62,-37.72
  Bottom 0.406: MCU7.1 275.73,-32.77 R85.2 277.48,-33.39 278.13,-34.04 R84.2 278.25,-35.81 278.89,-35.81 279.4,-36.32 279.4,-38.61 277.76,-40.25 R86.2 | MCU7.1 275.08,-32.77 | U$8.1 266.85,-9.25 268.73,-7.37 274.07,-7.37 274.32,-7.62 274.32,-9.4 273.95,-9.77 R87.1 274.69,-9.77 274.83,-9.91 274.83,-18.17 R88.1 274.2,-22.21 273.3,-23.11 273.3,-32.64 MCU7.1
7,4V  (via drill 0.6 pad 1.68)
  Top 0.406: IC2.2 51.04,62.87 51.04,62.12 C1.1
  Top 0.813: v58.42,63.25 R1.2 53.6,62.87 51.04,62.87
  Bottom 0.406: U$1.11 46.43,77.93 47.75,79.25 47.75,81.28 47.12,81.92
  Bottom 0.61: R6.2 44.46,85.85 38.35,91.95 33.02,91.95 31.24,90.17 JP10.P2 32.51,88.9 33.78,87.63 33.78,84.07 32.77,83.06 32.26,83.06 | 32.26,83.06 JP9.P2 | JP11.P2 32.51,77.47 33.53,78.49 33.53,81.79 32.26,83.06
  Bottom 0.813: R6.2 47.12,81.92 47.24,81.79 58.67,81.79 59.18,81.28 59.18,65.28 v58.42,63.25
7,4V1  (via drill 0.6 pad 1.68)
  Top 0.406: IC1.2 124.96,61.85 124.96,61.11 C7.1
  Top 0.813: v132.33,62.23 R12.2 127.52,61.85 124.96,61.85
  Bottom 0.406: U$2.11 120.34,76.91 121.67,78.23 121.67,80.26 121.03,80.9
  Bottom 0.61: R17.2 118.37,84.83 112.27,90.93 106.93,90.93 105.16,89.15 JP23.P2 106.43,87.88 107.7,86.61 107.7,83.06 106.68,82.04 106.17,82.04 | 106.17,82.04 JP22.P2 | JP24.P2 106.43,76.45 107.44,77.47 107.44,80.77 106.17,82.04
  Bottom 0.813: R17.2 121.03,80.9 121.16,80.77 132.59,80.77 133.1,80.26 133.1,64.26 v132.33,62.23
7,4V2  (via drill 0.6 pad 1.68)
  Top 0.406: IC3.2 51.8,-26.29 51.8,-27.03 C13.1
  Top 0.813: v59.18,-25.91 R23.2 54.37,-26.29 51.8,-26.29
  Bottom 0.406: U$3.11 47.19,-11.23 48.51,-9.91 48.51,-7.87 47.88,-7.24
  Bottom 0.61: R28.2 45.22,-3.31 39.12,2.79 33.78,2.79 32,1.02 JP35.P2 33.27,-0.25 34.54,-1.52 34.54,-5.08 33.53,-6.1 33.02,-6.1 | 33.02,-6.1 JP34.P2 | JP36.P2 33.27,-11.68 34.29,-10.67 34.29,-7.37 33.02,-6.1
  Bottom 0.813: R28.2 47.88,-7.24 48.01,-7.37 59.44,-7.37 59.94,-7.87 59.94,-23.88 v59.18,-25.91
7,4V3  (via drill 0.6 pad 1.68)
  Top 0.406: IC4.2 124.96,-25.27 124.96,-26.01 C19.1
  Top 0.813: v132.33,-24.89 R34.2 127.52,-25.27 124.96,-25.27
  Bottom 0.406: U$4.11 120.34,-10.21 121.67,-8.89 121.67,-6.86 121.03,-6.22
  Bottom 0.61: R39.2 118.37,-2.29 112.27,3.81 106.93,3.81 105.16,2.03 JP47.P2 106.43,0.76 107.7,-0.51 107.7,-4.06 106.68,-5.08 106.17,-5.08 | 106.17,-5.08 JP46.P2 | JP48.P2 106.43,-10.67 107.44,-9.65 107.44,-6.35 106.17,-5.08
  Bottom 0.813: R39.2 121.03,-6.22 121.16,-6.35 132.59,-6.35 133.1,-6.86 133.1,-22.86 v132.33,-24.89
7,4V4  (via drill 0.6 pad 1.68)
  Top 0.406: IC5.2 194.3,62.87 194.3,62.12 C25.1
  Top 0.813: v201.68,63.25 R45.2 196.86,62.87 194.3,62.87
  Bottom 0.406: U$5.11 189.69,77.93 191.01,79.25 191.01,81.28 190.37,81.92
  Bottom 0.61: R50.2 187.71,85.85 181.61,91.95 176.28,91.95 174.5,90.17 JP59.P2 175.77,88.9 177.04,87.63 177.04,84.07 176.02,83.06 175.51,83.06 | 175.51,83.06 JP58.P2 | JP60.P2 175.77,77.47 176.78,78.49 176.78,81.79 175.51,83.06
  Bottom 0.813: R50.2 190.37,81.92 190.5,81.79 201.93,81.79 202.44,81.28 202.44,65.28 v201.68,63.25
7,4V5  (via drill 0.6 pad 1.68)
  Top 0.406: IC6.2 268.21,61.85 C31.1
  Top 0.813: v275.59,62.23 R56.2 270.77,61.85 268.21,61.85
  Bottom 0.406: U$6.11 263.6,76.91 264.92,78.23 264.92,80.26 264.29,80.9
  Bottom 0.61: R61.2 261.63,84.83 255.52,90.93 250.19,90.93 248.41,89.15 JP71.P2 249.68,87.88 250.95,86.61 250.95,83.06 249.94,82.04 249.43,82.04 | 249.43,82.04 JP70.P2 | JP72.P2 249.68,76.45 250.7,77.47 250.7,80.77 249.43,82.04
  Bottom 0.813: R61.2 264.29,80.9 264.41,80.77 275.84,80.77 276.35,80.26 276.35,64.26 v275.59,62.23
7,4V6  (via drill 0.6 pad 1.68)
  Top 0.406: IC7.2 195.06,-26.29 C37.1
  Top 0.813: v202.44,-25.91 R67.2 197.62,-26.29 195.06,-26.29
  Bottom 0.406: U$7.11 190.45,-11.23 191.77,-9.91 191.77,-7.87 191.13,-7.24
  Bottom 0.61: R72.2 188.47,-3.31 182.37,2.79 177.04,2.79 175.26,1.02 JP83.P2 176.53,-0.25 177.8,-1.52 177.8,-5.08 176.78,-6.1 176.28,-6.1 | 176.28,-6.1 JP82.P2 | JP84.P2 176.53,-11.68 177.55,-10.67 177.55,-7.37 176.28,-6.1
  Bottom 0.813: R72.2 191.13,-7.24 191.26,-7.37 202.69,-7.37 203.2,-7.87 203.2,-23.88 v202.44,-25.91
7,4V7  (via drill 0.6 pad 1.68)
  Top 0.406: IC8.2 268.21,-25.27 C43.1
  Top 0.813: v275.59,-24.89 R78.2 270.77,-25.27 268.21,-25.27
  Bottom 0.406: U$8.11 263.6,-10.21 264.92,-8.89 264.92,-6.86 264.29,-6.22
  Bottom 0.61: R83.2 261.63,-2.29 255.52,3.81 250.19,3.81 248.41,2.03 JP95.P2 249.68,0.76 250.95,-0.51 250.95,-4.06 249.94,-5.08 249.43,-5.08 | 249.43,-5.08 JP94.P2 | JP96.P2 249.68,-10.67 250.7,-9.65 250.7,-6.35 249.43,-5.08
  Bottom 0.813: R83.2 264.29,-6.22 264.41,-6.35 275.84,-6.35 276.35,-6.86 276.35,-22.86 v275.59,-24.89
AFERFUSE
  Top 0.406: F1.2 44.96,45.72 45.21,45.47 45.72,44.96
  Top 0.61: 45.18,42.16 LED1.A 45.18,45.43 45.21,45.47 | 45.18,42.16 45.18,41.94 46.23,40.89 JP2.1 | JP7.1 30.99,41.4 32,42.42 38.35,42.42 38.61,42.16 | 38.35,38.35 38.61,38.61 JP6.1 38.61,42.16 | 38.61,42.16 38.86,42.16 39.12,42.42 44.92,42.42 | 44.92,42.42 45.18,42.16 | JP5.1 53.85,41.91 53.34,42.42 44.92,42.42
AFERFUSE1
  Top 0.406: F2.2 118.87,44.7 119.13,44.45 119.63,43.94
  Top 0.61: 119.09,41.15 LED2.A 119.09,44.42 119.13,44.45 | 119.09,41.15 119.09,40.93 120.14,39.88 JP14.1 | JP19.1 104.9,40.39 105.92,41.4 112.27,41.4 112.52,41.15 | 112.27,37.34 112.52,37.59 JP18.1 112.52,41.15 | 112.52,41.15 112.78,41.15 113.03,41.4 118.84,41.4 | 118.84,41.4 119.09,41.15 | JP17.1 127.76,40.89 127.25,41.4 118.84,41.4
AFERFUSE2
  Top 0.406: F3.2 45.72,-43.43 45.97,-43.69 46.48,-44.2
  Top 0.61: 45.94,-46.99 LED3.A 45.94,-43.72 45.97,-43.69 | 45.94,-46.99 45.94,-47.21 46.99,-48.26 JP26.1 | JP31.1 31.75,-47.75 32.77,-46.74 39.12,-46.74 39.37,-46.99 | 39.12,-50.8 39.37,-50.55 JP30.1 39.37,-46.99 | 39.37,-46.99 39.62,-46.99 39.88,-46.74 45.69,-46.74 | 45.69,-46.74 45.94,-46.99 | JP29.1 54.61,-47.24 54.1,-46.74 45.69,-46.74
AFERFUSE3
  Top 0.406: F4.2 118.87,-42.42 119.13,-42.67 119.63,-43.18
  Top 0.61: 119.09,-45.97 LED4.A 119.09,-42.71 119.13,-42.67 | 119.09,-45.97 119.09,-46.19 120.14,-47.24 JP38.1 | JP43.1 104.9,-46.74 105.92,-45.72 112.27,-45.72 112.52,-45.97 | 112.27,-49.78 112.52,-49.53 JP42.1 112.52,-45.97 | 112.52,-45.97 112.78,-45.97 113.03,-45.72 118.84,-45.72 | 118.84,-45.72 119.09,-45.97 | JP41.1 127.76,-46.23 127.25,-45.72 118.84,-45.72
AFERFUSE4
  Top 0.406: F5.2 188.21,45.72 188.47,45.47 188.98,44.96
  Top 0.61: 188.43,42.16 LED5.A 188.43,45.43 188.47,45.47 | 188.43,42.16 188.43,41.94 189.48,40.89 JP50.1 | JP55.1 174.24,41.4 175.26,42.42 181.61,42.42 181.86,42.16 | 181.61,38.35 181.86,38.61 JP54.1 181.86,42.16 | 181.86,42.16 182.12,42.16 182.37,42.42 188.18,42.42 | 188.18,42.42 188.43,42.16 | JP53.1 197.1,41.91 196.6,42.42 188.18,42.42
AFERFUSE5
  Top 0.406: F6.2 262.13,44.7 262.38,44.45 262.89,43.94
  Top 0.61: 262.35,41.15 LED6.A 262.35,44.42 262.38,44.45 | 262.35,41.15 262.35,40.93 263.4,39.88 JP62.1 | JP67.1 248.16,40.39 249.17,41.4 255.52,41.4 255.78,41.15 | 255.52,37.34 255.78,37.59 JP66.1 255.78,41.15 | 255.78,41.15 256.03,41.15 256.29,41.4 262.09,41.4 | 262.09,41.4 262.35,41.15 | JP65.1 271.02,40.89 270.51,41.4 262.09,41.4
AFERFUSE6
  Top 0.406: F7.2 188.98,-43.43 189.23,-43.69 189.74,-44.2
  Top 0.61: 189.2,-46.99 LED7.A 189.2,-43.72 189.23,-43.69 | 189.2,-46.99 189.2,-47.21 190.25,-48.26 JP74.1 | JP79.1 175.01,-47.75 176.02,-46.74 182.37,-46.74 182.63,-46.99 | 182.37,-50.8 182.63,-50.55 JP78.1 182.63,-46.99 | 182.63,-46.99 182.88,-46.99 183.13,-46.74 188.94,-46.74 | 188.94,-46.74 189.2,-46.99 | JP77.1 197.87,-47.24 197.36,-46.74 188.94,-46.74
AFERFUSE7
  Top 0.406: F8.2 262.13,-42.42 262.38,-42.67 262.89,-43.18
  Top 0.61: 262.35,-45.97 LED8.A 262.35,-42.71 262.38,-42.67 | 262.35,-45.97 262.35,-46.19 263.4,-47.24 JP86.1 | JP91.1 248.16,-46.74 249.17,-45.72 255.52,-45.72 255.78,-45.97 | 255.52,-49.78 255.78,-49.53 JP90.1 255.78,-45.97 | 255.78,-45.97 256.03,-45.97 256.29,-45.72 262.09,-45.72 | 262.09,-45.72 262.35,-45.97 | JP89.1 271.02,-46.23 270.51,-45.72 262.09,-45.72
COIL
  Top 1.27: JP3.1 59.26,90.09 | 59.26,90.09 59.82,89.53 60.45,88.9 60.45,33.71 JP4.1 | K1.1 55.88,93.47 59.26,90.09
  Bottom 1.27: JP8.1 27,93.55 25.91,92.46 25.91,34.29 27.69,32.51 59.26,32.51 JP4.1
COIL1
  Top 1.27: JP15.1 133.17,89.08 | 133.17,89.08 133.73,88.52 134.37,87.88 134.37,32.69 JP16.1 | K2.1 129.79,92.46 133.17,89.08
  Bottom 1.27: JP20.1 100.91,92.53 99.82,91.44 99.82,33.27 101.6,31.5 133.17,31.5 JP16.1
COIL2
  Top 1.27: JP27.1 60.02,0.94 | 60.02,0.94 60.58,0.38 61.21,-0.25 61.21,-55.45 JP28.1 | K3.1 56.64,4.32 60.02,0.94
  Bottom 1.27: JP32.1 27.76,4.39 26.67,3.3 26.67,-54.86 28.45,-56.64 60.02,-56.64 JP28.1
COIL3
  Top 1.27: JP39.1 133.17,1.96 | 133.17,1.96 133.73,1.4 134.37,0.76 134.37,-54.43 JP40.1 | K4.1 129.79,5.33 133.17,1.96
  Bottom 1.27: JP44.1 100.91,5.41 99.82,4.32 99.82,-53.85 101.6,-55.63 133.17,-55.63 JP40.1
COIL4
  Top 1.27: JP51.1 202.51,90.09 | 202.51,90.09 203.07,89.53 203.71,88.9 203.71,33.71 JP52.1 | K5.1 199.14,93.47 202.51,90.09
  Bottom 1.27: JP56.1 170.26,93.55 169.16,92.46 169.16,34.29 170.94,32.51 202.51,32.51 JP52.1
COIL5
  Top 1.27: JP63.1 276.43,89.08 | 276.43,89.08 276.99,88.52 277.62,87.88 277.62,32.69 JP64.1 | K6.1 273.05,92.46 276.43,89.08
  Bottom 1.27: JP68.1 244.17,92.53 243.08,91.44 243.08,33.27 244.86,31.5 276.43,31.5 JP64.1
COIL6
  Top 1.27: JP75.1 203.28,0.94 | 203.28,0.94 203.84,0.38 204.47,-0.25 204.47,-55.45 JP76.1 | K7.1 199.9,4.32 203.28,0.94
  Bottom 1.27: JP80.1 171.02,4.39 169.93,3.3 169.93,-54.86 171.7,-56.64 203.28,-56.64 JP76.1
COIL7
  Top 1.27: JP87.1 276.43,1.96 | 276.43,1.96 276.99,1.4 277.62,0.76 277.62,-54.43 JP88.1 | K8.1 273.05,5.33 276.43,1.96
  Bottom 1.27: JP92.1 244.17,5.41 243.08,4.32 243.08,-53.85 244.86,-55.63 276.43,-55.63 JP88.1
COUT  (via drill 0.6 pad 1.68)  (1 unrouted)
  Top 0.406: D2.C 43.43,57.29 C5.2 43.3,58.67 40.64,58.67 38.35,56.39 38.35,54.86 | IC2.3 49.91,64.14 50.55,64.77 | 40.64,53.59 v41.4,54.36
  Top 0.61: 40.64,53.59 39.62,53.59 38.35,54.86 37.08,56.13 L2.P$1
  Bottom 0.406: 50.29,64.52 50.55,64.77
  Bottom 0.61: 50.29,64.52 45.72,64.52 42.67,61.47 42.67,55.63 v41.4,54.36
COUT1  (via drill 0.6 pad 1.68)  (1 unrouted)
  Top 0.406: D1.C 117.35,56.27 C11.2 117.21,57.66 114.55,57.66 112.27,55.37 112.27,53.85 | IC1.3 123.83,63.12 124.46,63.75 | 114.55,52.58 v115.32,53.34
  Top 0.61: 114.55,52.58 113.54,52.58 112.27,53.85 111,55.12 L1.P$1
  Bottom 0.406: 124.21,63.5 124.46,63.75
  Bottom 0.61: 124.21,63.5 119.63,63.5 116.59,60.45 116.59,54.61 v115.32,53.34
COUT2  (via drill 0.6 pad 1.68)  (1 unrouted)
  Top 0.406: D3.C 44.2,-31.87 C17.2 44.06,-30.48 41.4,-30.48 39.12,-32.77 39.12,-34.29 | IC3.3 50.67,-25.02 51.31,-24.38 | 41.4,-35.56 v42.16,-34.8
  Top 0.61: 41.4,-35.56 40.39,-35.56 39.12,-34.29 37.85,-33.02 L3.P$1
  Bottom 0.406: 51.05,-24.64 51.31,-24.38
  Bottom 0.61: 51.05,-24.64 46.48,-24.64 43.43,-27.69 43.43,-33.53 v42.16,-34.8
COUT3  (via drill 0.6 pad 1.68)  (1 unrouted)
  Top 0.406: D4.C 117.35,-30.85 C23.2 117.21,-29.46 114.55,-29.46 112.27,-31.75 112.27,-33.27 | IC4.3 123.83,-24 124.46,-23.37 | 114.55,-34.54 v115.32,-33.78
  Top 0.61: 114.55,-34.54 113.54,-34.54 112.27,-33.27 111,-32 L4.P$1
  Bottom 0.406: 124.21,-23.62 124.46,-23.37
  Bottom 0.61: 124.21,-23.62 119.63,-23.62 116.59,-26.67 116.59,-32.51 v115.32,-33.78
COUT4  (via drill 0.6 pad 1.68)  (1 unrouted)
  Top 0.406: D5.C 186.69,57.29 C29.2 186.55,58.67 183.9,58.67 181.61,56.39 181.61,54.86 | IC5.3 193.17,64.14 193.8,64.77 | 183.9,53.59 v184.66,54.36
  Top 0.61: 183.9,53.59 182.88,53.59 181.61,54.86 180.34,56.13 L5.P$1
  Bottom 0.406: 193.55,64.52 193.8,64.77
  Bottom 0.61: 193.55,64.52 188.98,64.52 185.93,61.47 185.93,55.63 v184.66,54.36
COUT5  (via drill 0.6 pad 1.68)  (1 unrouted)
  Top 0.406: D6.C 260.6,56.27 C35.2 260.47,57.66 257.81,57.66 255.52,55.37 255.52,53.85 | IC6.3 267.08,63.12 267.72,63.75 | 257.81,52.58 v258.57,53.34
  Top 0.61: 257.81,52.58 256.79,52.58 255.52,53.85 254.25,55.12 L6.P$1
  Bottom 0.406: 267.46,63.5 267.72,63.75
  Bottom 0.61: 267.46,63.5 262.89,63.5 259.84,60.45 259.84,54.61 v258.57,53.34
COUT6  (via drill 0.6 pad 1.68)  (1 unrouted)
  Top 0.406: D7.C 187.45,-31.87 C41.2 187.31,-30.48 184.66,-30.48 182.37,-32.77 182.37,-34.29 | IC7.3 193.93,-25.02 194.56,-24.38 | 184.66,-35.56 v185.42,-34.8
  Top 0.61: 184.66,-35.56 183.64,-35.56 182.37,-34.29 181.1,-33.02 L7.P$1
  Bottom 0.406: 194.31,-24.64 194.56,-24.38
  Bottom 0.61: 194.31,-24.64 189.74,-24.64 186.69,-27.69 186.69,-33.53 v185.42,-34.8
COUT7  (via drill 0.6 pad 1.68)  (1 unrouted)
  Top 0.406: D8.C 260.6,-30.85 C47.2 260.47,-29.46 257.81,-29.46 255.52,-31.75 255.52,-33.27 | IC8.3 267.08,-24 267.72,-23.37 | 257.81,-34.54 v258.57,-33.78
  Top 0.61: 257.81,-34.54 256.79,-34.54 255.52,-33.27 254.25,-32 L8.P$1
  Bottom 0.406: 267.46,-23.62 267.72,-23.37
  Bottom 0.61: 267.46,-23.62 262.89,-23.62 259.84,-26.67 259.84,-32.51 v258.57,-33.78
GND  (via drill 0.6, 0.6 pad 1.27, 0.6 pad 1.68)
  Top 0.406: C2.2 42.79,68.33 C4.2 | v52.58,79.76 52.32,79.76 51.05,78.49 v51.05,72.39
  Top 0.61: IC2.8 41.53,61.59 v40.13,62.99
  Top 0.813: 35.56,92.71 35.31,92.71 33.53,90.93 33.53,86.87 33.27,86.61 31.5,86.61 JP10.P1
  Top 1.016: JP1.1 35.31,92.96 35.56,92.71 46.99,92.71 K1.2
  Bottom 0.406: JP5.2 56.64,38.86 59.69,41.91 59.69,46.23 58.42,47.5 56.01,47.5 MCU.4 | U$1.6 U$1.5 49.68,74.02 50.55,73.15 50.55,72.9 v51.05,72.39 | C6.2 52.07,75.95 53.34,74.68 54.36,74.68 SJ1.1 56.13,74.42 v56.39,74.68 | v52.58,79.76 SJ3.1
  Bottom 0.61: v48.77,67.82 38.61,67.82 | 38.61,67.82 33.27,67.82 v29.21,71.88 | v40.13,62.99 40.13,66.29 38.61,67.82
  Bottom 0.813: JP10.P1 30.23,86.36 28.7,84.84 28.7,81.79 29.97,80.52 | 29.97,80.52 JP9.P1 | JP11.P1 30.48,74.93 28.96,76.45 28.96,79.5 29.97,80.52 | JP7.2 33.53,37.08 36.07,34.54 40.13,34.54 41.15,35.56 JP6.2 41.15,35.81 42.42,34.54 47.75,34.54 48.77,35.56 JP2.2 48.77,35.81 50.04,34.54 55.37,34.54 56.39,35.56 JP5.2
  other vias: 47.24,52.83
  pour Top (isolate 0.762): 23.88,74.93 58.42,74.93 58.42,35.31 23.88,35.31
  pour Bottom (isolate 1.524): 64.01,30.48 23.88,30.48 23.88,98.55 64.52,98.55 64.52,30.48
GND1  (via drill 0.6, 0.6 pad 1.27, 0.6 pad 1.68)
  Top 0.406: C8.2 116.7,67.31 C10.2 | v126.49,78.74 126.24,78.74 124.97,77.47 v124.97,71.37
  Top 0.61: IC1.8 115.44,60.58 v114.05,61.98
  Top 0.813: 109.47,91.69 109.22,91.69 107.44,89.92 107.44,85.85 107.19,85.6 105.41,85.6 JP23.P1
  Top 1.016: JP13.1 109.22,91.95 109.47,91.69 120.9,91.69 K2.2
  Bottom 0.406: JP17.2 130.56,37.85 133.6,40.89 133.6,45.21 132.33,46.48 129.92,46.48 MCU1.4 | U$2.6 U$2.5 123.6,73 124.46,72.14 124.46,71.88 v124.97,71.37 | C12.2 125.98,74.93 127.25,73.66 128.27,73.66 SJ4.1 130.05,73.41 v130.3,73.66 | v126.49,78.74 SJ2.1
  Bottom 0.61: v122.68,66.8 112.52,66.8 | 112.52,66.8 107.19,66.8 v103.12,70.87 | v114.05,61.98 114.05,65.28 112.52,66.8
  Bottom 0.813: JP23.P1 104.14,85.34 102.62,83.82 102.62,80.77 103.89,79.5 | 103.89,79.5 JP22.P1 | JP24.P1 104.39,73.91 102.87,75.44 102.87,78.49 103.89,79.5 | JP19.2 107.44,36.07 109.98,33.53 114.05,33.53 115.06,34.54 JP18.2 115.06,34.8 116.33,33.53 121.67,33.53 122.68,34.54 JP14.2 122.68,34.8 123.95,33.53 129.29,33.53 130.3,34.54 JP17.2
  other vias: 121.16,51.82
  pour Top (isolate 0.762): 97.79,73.91 132.33,73.91 132.33,34.29 97.79,34.29
  pour Bottom (isolate 1.524): 137.92,29.46 97.79,29.46 97.79,97.54 138.43,97.54 138.43,29.46
GND2  (via drill 0.6, 0.6 pad 1.27, 0.6 pad 1.68)
  Top 0.406: C14.2 43.55,-20.83 C16.2 | v53.34,-9.4 53.09,-9.4 51.82,-10.67 v51.82,-16.76
  Top 0.61: IC3.8 42.29,-27.56 v40.89,-26.16
  Top 0.813: 36.32,3.56 36.07,3.56 34.29,1.78 34.29,-2.29 34.04,-2.54 32.26,-2.54 JP35.P1
  Top 1.016: JP25.1 36.07,3.81 36.32,3.56 47.75,3.56 K3.2
  Bottom 0.406: JP29.2 57.4,-50.29 60.45,-47.24 60.45,-42.93 59.18,-41.66 56.77,-41.66 MCU2.4 | U$3.6 U$3.5 50.44,-15.14 51.31,-16 51.31,-16.26 v51.82,-16.76 | C18.2 52.83,-13.21 54.1,-14.48 55.12,-14.48 SJ6.1 56.9,-14.73 v57.15,-14.48 | v53.34,-9.4 SJ5.1
  Bottom 0.61: v49.53,-21.34 39.37,-21.34 | 39.37,-21.34 34.04,-21.34 v29.97,-17.27 | v40.89,-26.16 40.89,-22.86 39.37,-21.34
  Bottom 0.813: JP35.P1 30.99,-2.79 29.46,-4.32 29.46,-7.37 30.73,-8.64 | 30.73,-8.64 JP34.P1 | JP36.P1 31.24,-14.22 29.72,-12.7 29.72,-9.65 30.73,-8.64 | JP31.2 34.29,-52.07 36.83,-54.61 40.89,-54.61 41.91,-53.59 JP30.2 41.91,-53.34 43.18,-54.61 48.51,-54.61 49.53,-53.59 JP26.2 49.53,-53.34 50.8,-54.61 56.13,-54.61 57.15,-53.59 JP29.2
  other vias: 48.01,-36.32
  pour Top (isolate 0.762): 24.64,-14.22 59.18,-14.22 59.18,-53.85 24.64,-53.85
  pour Bottom (isolate 1.524): 64.77,-58.67 24.64,-58.67 24.64,9.4 65.28,9.4 65.28,-58.67
GND3  (via drill 0.6, 0.6 pad 1.27, 0.6 pad 1.68)
  Top 0.406: C20.2 116.7,-19.81 C22.2 | v126.49,-8.38 126.24,-8.38 124.97,-9.65 v124.97,-15.75
  Top 0.61: IC4.8 115.44,-26.54 v114.05,-25.15
  Top 0.813: 109.47,4.57 109.22,4.57 107.44,2.79 107.44,-1.27 107.19,-1.52 105.41,-1.52 JP47.P1
  Top 1.016: JP37.1 109.22,4.83 109.47,4.57 120.9,4.57 K4.2
  Bottom 0.406: JP41.2 130.56,-49.28 133.6,-46.23 133.6,-41.91 132.33,-40.64 129.92,-40.64 MCU3.4 | U$4.6 U$4.5 123.6,-14.12 124.46,-14.99 124.46,-15.24 v124.97,-15.75 | C24.2 125.98,-12.19 127.25,-13.46 128.27,-13.46 SJ8.1 130.05,-13.72 v130.3,-13.46 | v126.49,-8.38 SJ7.1
  Bottom 0.61: v122.68,-20.32 112.52,-20.32 | 112.52,-20.32 107.19,-20.32 v103.12,-16.26 | v114.05,-25.15 114.05,-21.84 112.52,-20.32
  Bottom 0.813: JP47.P1 104.14,-1.78 102.62,-3.3 102.62,-6.35 103.89,-7.62 | 103.89,-7.62 JP46.P1 | JP48.P1 104.39,-13.21 102.87,-11.68 102.87,-8.64 103.89,-7.62 | JP43.2 107.44,-51.05 109.98,-53.59 114.05,-53.59 115.06,-52.58 JP42.2 115.06,-52.32 116.33,-53.59 121.67,-53.59 122.68,-52.58 JP38.2 122.68,-52.32 123.95,-53.59 129.29,-53.59 130.3,-52.58 JP41.2
  other vias: 121.16,-35.31
  pour Top (isolate 0.762): 97.79,-13.21 132.33,-13.21 132.33,-52.83 97.79,-52.83
  pour Bottom (isolate 1.524): 137.92,-57.66 97.79,-57.66 97.79,10.41 138.43,10.41 138.43,-57.66
GND4  (via drill 0.6, 0.6 pad 1.27, 0.6 pad 1.68)
  Top 0.406: C26.2 186.04,68.33 C28.2 | v195.83,79.76 195.58,79.76 194.31,78.49 v194.31,72.39
  Top 0.61: IC5.8 184.78,61.59 v183.39,62.99
  Top 0.813: 178.82,92.71 178.56,92.71 176.78,90.93 176.78,86.87 176.53,86.61 174.75,86.61 JP59.P1
  Top 1.016: JP49.1 178.56,92.96 178.82,92.71 190.25,92.71 K5.2
  Bottom 0.406: JP53.2 199.9,38.86 202.95,41.91 202.95,46.23 201.68,47.5 199.26,47.5 MCU4.4 | U$5.6 U$5.5 192.94,74.02 193.8,73.15 193.8,72.9 v194.31,72.39 | C30.2 195.33,75.95 196.6,74.68 197.61,74.68 SJ10.1 199.39,74.42 v199.64,74.68 | v195.83,79.76 SJ9.1
  Bottom 0.61: v192.02,67.82 181.86,67.82 | 181.86,67.82 176.53,67.82 v172.47,71.88 | v183.39,62.99 183.39,66.29 181.86,67.82